# Altium PCB motordriver-v5.2 - panel.PcbDoc
Units mil, origin at the board's own origin, x right, y up, seen from the top; angles counter-clockwise.
Board outline 5010 x 6620 mil, 6 copper layers (Top Copper, GND Layer 1, Signal Layer 1, Signal Layer 2, PWR Layer 1, Bottom Copper), stack 58.2 mil thick; 32 components, 0 nets, 252 pads, 0 vias.
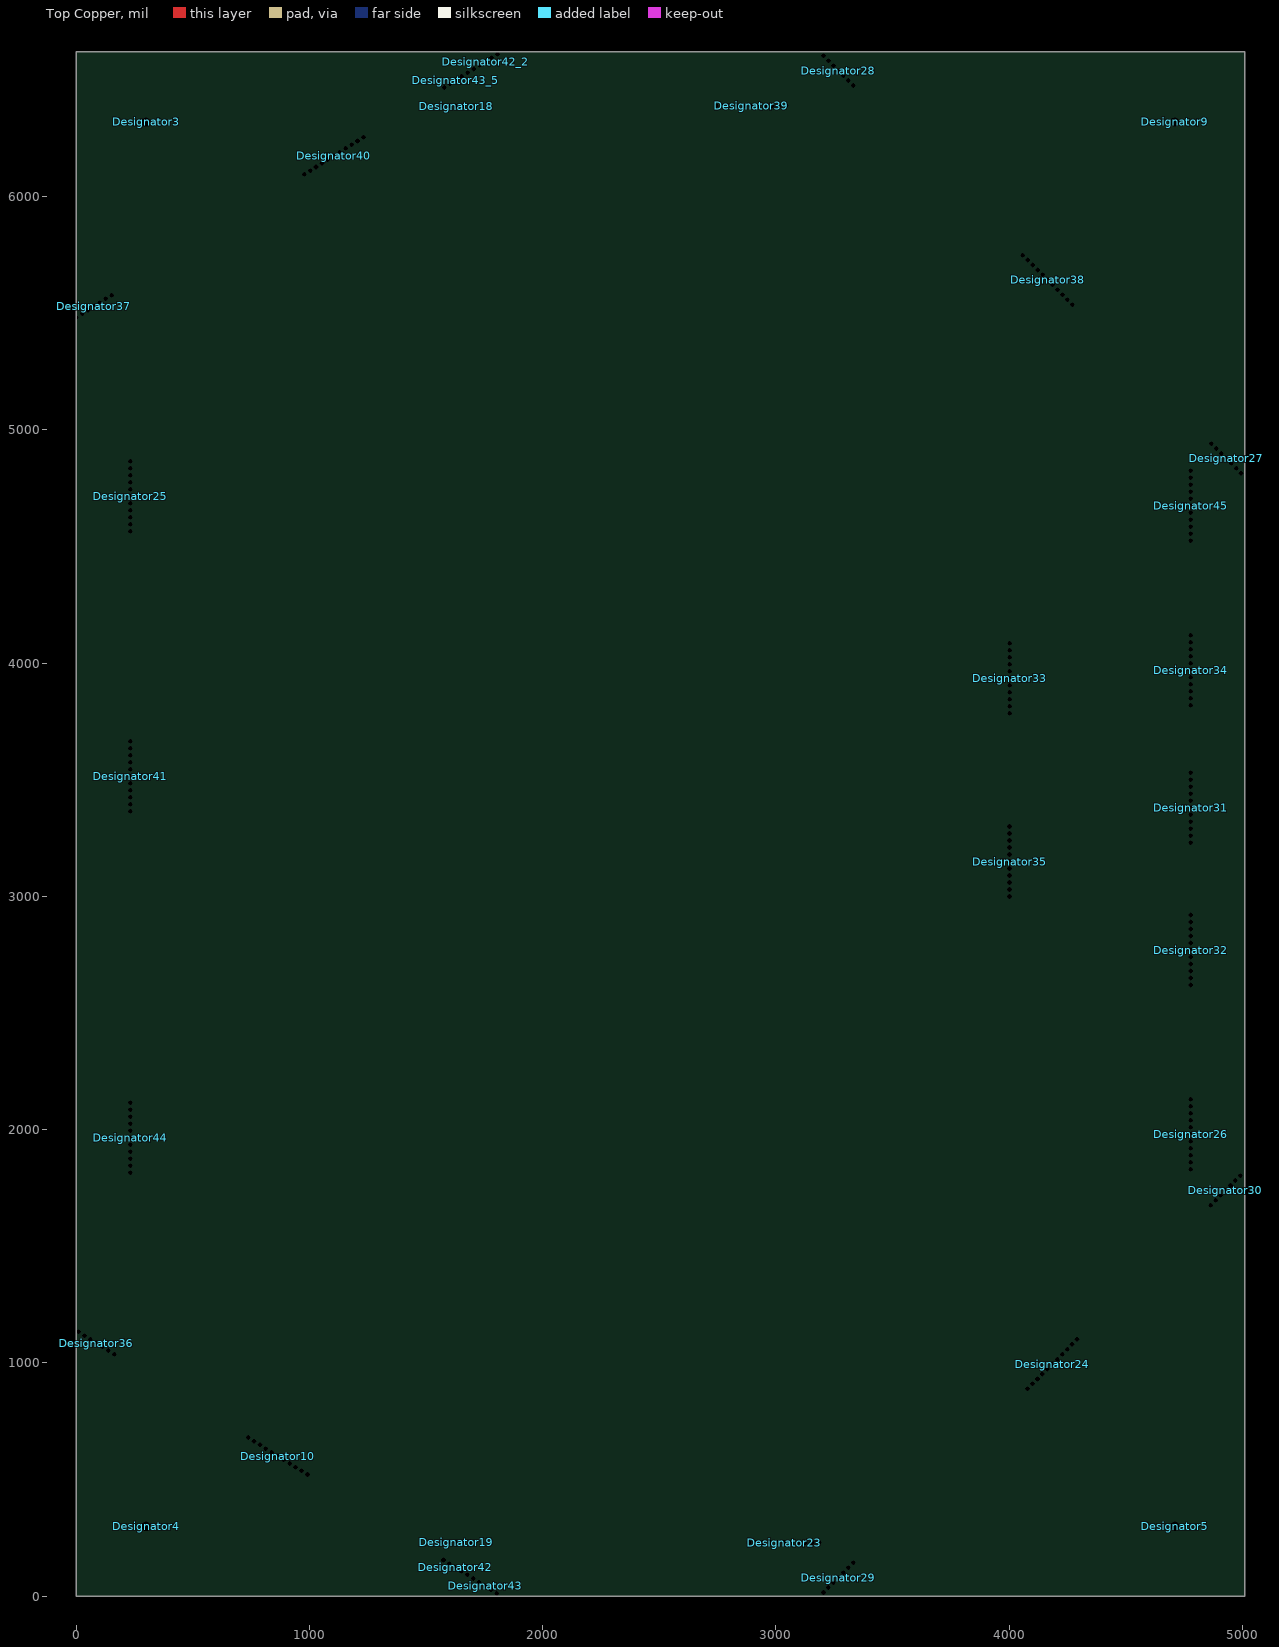
[diagram p0: Top Copper view]
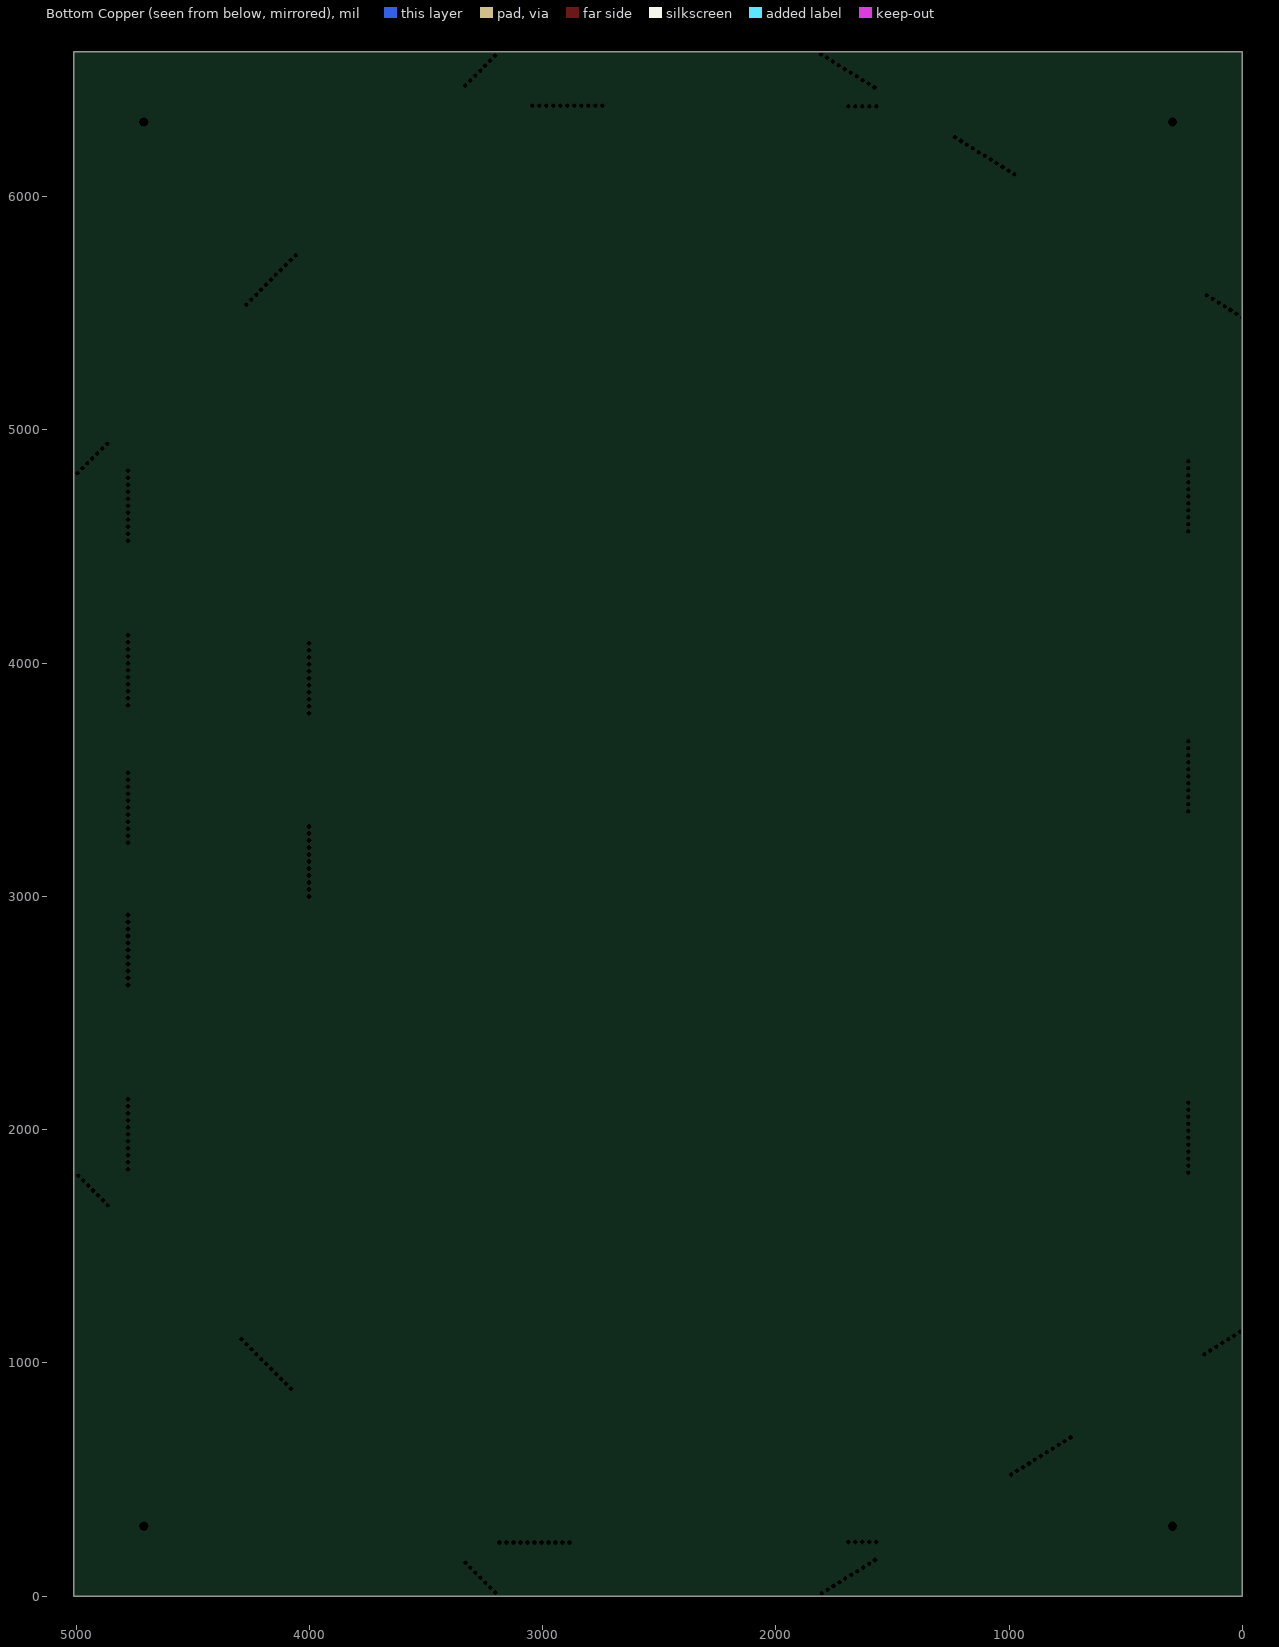
[diagram p1: Bottom Copper view, seen from below]

## Layer stack, top to bottom
Top Mask: solder mask 0.591, Solder Resist, Dk 3.8
Top Copper: signal copper 1.4
Dielectric 1: prepreg 4.05, 2116, Dk 4.2
Dielectric 2: prepreg 4.05, 2116, Dk 4.2
GND Layer 1: signal copper 1.4
Core 1: core 14, FR-4, Dk 4.2
Signal Layer 1: signal copper 1.4
Dielectric 3: prepreg 2.8, 2116, Dk 4.2
Dielectric 4: prepreg 2.8, 2116, Dk 4.2
Signal Layer 2: signal copper 1.4
Core 2: core 14, FR-4, Dk 4.2
PWR Layer 1: signal copper 1.4
Dielectric 5: prepreg 4.05, 2116, Dk 4.2
Dielectric 6: prepreg 4.05, 2116, Dk 4.2
Bottom Copper: signal copper 1.4
Bottom Mask: solder mask 0.591, Solder Resist, Dk 3.8

## Board outline
0,0 0,6620 5010,6620 5010,0

## Design rules (kind name [scope] priority, off if disabled: settings)
Clearance [All] p1: gap=10 ignorepadtopadclearanceinfootprint=FALSE except(0: Arc-Hole Track-Hole SMDPad-Hole THPad-Hole Via-Hole Fill-Hole Poly-Hole Region-Hole Text-Hole)
PolygonConnect [All] p1: connectstyle=Relief reliefconductorwidth=10 reliefentries=4 polygonreliefangle="90 Angle" airgapwidth=10
RoutingVias [All] p1: holewidth=28 width=50 viastyle="Through Hole" minholewidth=28 minwidth=50 maxholewidth=28 maxwidth=50
SolderMaskExpansion [All] p1: expansion=4 istentingtop=FALSE
Width [All] p1: maxlimit=10 minlimit=10 preferedwidth=10
30 further rules are at their usual default settings.

## Components (designator, comment, footprint, x,y, rotation, side; value= is the part's Value field where it differs from the comment)
Designator3 "Comment" Fiducial 300,6320 r0 top
Designator4 "Comment" Fiducial 300,300 r0 top
Designator5 "Comment" Fiducial 4710,300 r0 top
Designator9 "Comment" Fiducial 4710,6320 r0 top
Designator10 "Comment" "Mouse Bites"#1 851.31,579.7 r148 top
Designator18 "Comment" "Mouse Bites"#2 1630,6424 r0 top
Designator19 "Comment" "Mouse Bites"#2 1630,196 r180 top
Designator23 "Comment" "Mouse Bites"#1 3035,205 r180 top
Designator24 "Comment" "Mouse Bites"#1 4202.68,977.32 r225 top
Designator25 "Comment" "Mouse Bites"#1 207,4715 r90 top
Designator26 "Comment" "Mouse Bites"#1 4803,1980 r270 top
Designator27 "Comment" "Mouse Bites - 45 degrees" 4934.85,4924.24 r315 top
Designator28 "Comment" "Mouse Bites - 45 degrees" 3272.42,6586.67 r315 top
Designator29 "Comment" "Mouse Bites - 45 degrees" 3314.24,75.15 r225 top
Designator30 "Comment" "Mouse Bites - 45 degrees" 4974.24,1735.15 r225 top
Designator31 "Comment" "Mouse Bites"#1 4803,3380.6 r270 top
Designator32 "Comment" "Mouse Bites"#1 4803,2770 r270 top
Designator33 "Comment" "Mouse Bites"#1 4027.14,3935.27 r270 top
Designator34 "Comment" "Mouse Bites"#1 4803,3970 r270 top
Designator35 "Comment" "Mouse Bites"#1 4026.79,3149.28 r270 top
Designator36 "Comment" "Mouse Bites - 45 degrees" 93.21,1038.79 r148 top
Designator37 "Comment" "Mouse Bites - 45 degrees" 32.11,5544.3 r32 top
Designator38 "Comment" "Mouse Bites"#1 4182.68,5660.85 r315 top
Designator39 "Comment" "Mouse Bites"#1 2895,6415 r0 top
Designator40 "Comment" "Mouse Bites"#1 1091.75,6196.2 r32 top
Designator41 "Comment" "Mouse Bites"#1 207,3515 r90 top
Designator42 "Comment" "Mouse Bites"#2 1606.81,92.68 r148 top
Designator42_2 "Comment" "Mouse Bites"#3 1736.69,6609.44 r212 top
Designator43 "Comment" "Mouse Bites"#2 1734.01,13.19 r148 top
Designator43_5 "Comment" "Mouse Bites"#3 1609.48,6529.95 r212 top
Designator44 "Comment" "Mouse Bites"#1 207,1965 r90 top
Designator45 "Comment" "Mouse Bites"#1 4803,4675 r270 top

## Footprints (in the part's own frame and the unit in brackets; to place one, negate y for a bottom-side part, rotate by r counter-clockwise, add the part's x,y. Pads: shape width x height; smd on the part's side, far side on the other; paste and mask are expansions set on the pad)
Fiducial [mm] "1mm Fiducial for tack"
  round 0 hole 1 unplated mask+1: 1(0,0)
"Mouse Bites"#1 [mil] "Mouse Bites 100mil groove, 20mil holes, 30 mil separation"
  round 0 hole 20 unplated mask+0: 1(-150,-25) 2(-120,-25) 3(-90,-25) 4(-60,-25) 5(-30,-25) 6(0,-25) 7(30,-25) 8(60,-25) 9(90,-25) 10(120,-25) 11(150,-25)
"Mouse Bites"#2 [mil] "Mouse Bites 100mil groove, 20mil holes, 30 mil separation"
  round 0 hole 20 unplated mask+0: 1(-60,-36) 1(-30,-36) 1(0,-36) 1(30,-36) 1(60,-36)
"Mouse Bites"#3 [mil] "Mouse Bites 100mil groove, 20mil holes, 30 mil separation"
  round 0 hole 20 unplated mask+0: 1(-60,36) 1(-30,36) 1(0,36) 1(30,36) 1(60,36)
"Mouse Bites - 45 degrees" [mil] "Mouse Bites 100mil groove, 20mil holes, 30 mil separation"
  round 0 hole 20 unplated mask+0: 1(-60,-36) 1(-30,-36) 1(0,-36) 1(30,-36) 1(60,-36) 1(90,-36) 1(120,-36)

## Part data
Designator10 Designator23 Designator24 Designator25 Designator26 Designator31 Designator32 Designator33 Designator34 Designator35 Designator38 Designator39 Designator40 Designator41 Designator44 Designator45: library part "Mouse Bites"

## Nets (pads, with @x,y where several pads share a name; then routed paths per layer and width w, separated by ;. In a path a pad name is that pad's centre, name@x,y a point inside that pad or via, vN(x,y) a via of type N, cw(c..) or ccw(c..) an arc to the next point about the centre after c; other vN are vias at no path point)
pads on no net: Designator3.1 Designator4.1 Designator5.1 Designator9.1 Designator10.1 Designator10.2 Designator10.3 Designator10.4 Designator10.5 Designator10.6 Designator10.7 Designator10.8 Designator10.9 Designator10.10 Designator10.11 Designator18.1 Designator19.1 Designator23.1 Designator23.2 Designator23.3 Designator23.4 Designator23.5 Designator23.6 Designator23.7 Designator23.8 Designator23.9 Designator23.10 Designator23.11 Designator24.1 Designator24.2 Designator24.3 Designator24.4 Designator24.5 Designator24.6 Designator24.7 Designator24.8 Designator24.9 Designator24.10 Designator24.11 Designator25.1 Designator25.2 Designator25.3 Designator25.4 Designator25.5 Designator25.6 Designator25.7 Designator25.8 Designator25.9 Designator25.10 Designator25.11 Designator26.1 Designator26.2 Designator26.3 Designator26.4 Designator26.5 Designator26.6 Designator26.7 Designator26.8 Designator26.9 Designator26.10 Designator26.11 Designator27.1 Designator28.1 Designator29.1 Designator30.1 Designator31.1 Designator31.2 Designator31.3 Designator31.4 Designator31.5 Designator31.6 Designator31.7 Designator31.8 Designator31.9 Designator31.10 Designator31.11 Designator32.1 Designator32.2 Designator32.3 Designator32.4 Designator32.5 Designator32.6 Designator32.7 Designator32.8 Designator32.9 Designator32.10 Designator32.11 Designator33.1 Designator33.2 Designator33.3 Designator33.4 Designator33.5 Designator33.6 Designator33.7 Designator33.8 Designator33.9 Designator33.10 Designator33.11 Designator34.1 Designator34.2 Designator34.3 Designator34.4 Designator34.5 Designator34.6 Designator34.7 Designator34.8 Designator34.9 Designator34.10 Designator34.11 Designator35.1 Designator35.2 Designator35.3 Designator35.4 Designator35.5 Designator35.6 Designator35.7 Designator35.8 Designator35.9 Designator35.10 Designator35.11 Designator36.1 Designator37.1 Designator38.1 Designator38.2 Designator38.3 Designator38.4 Designator38.5 Designator38.6 Designator38.7 Designator38.8 Designator38.9 Designator38.10 Designator38.11 Designator39.1 Designator39.2 Designator39.3 Designator39.4 Designator39.5 Designator39.6 Designator39.7 Designator39.8 Designator39.9 Designator39.10 Designator39.11 Designator40.1 Designator40.2 Designator40.3 Designator40.4 Designator40.5 Designator40.6 Designator40.7 Designator40.8 Designator40.9 Designator40.10 Designator40.11 Designator41.1 Designator41.2 Designator41.3 Designator41.4 Designator41.5 Designator41.6 Designator41.7 Designator41.8 Designator41.9 Designator41.10 Designator41.11 Designator42.1 Designator42_2.1 Designator43.1 Designator43_5.1 Designator44.1 Designator44.2 Designator44.3 Designator44.4 Designator44.5 Designator44.6 Designator44.7 Designator44.8 Designator44.9 Designator44.10 Designator44.11 Designator45.1 Designator45.2 Designator45.3 Designator45.4 Designator45.5 Designator45.6 Designator45.7 Designator45.8 Designator45.9 Designator45.10 Designator45.11

## Silkscreen, mask and mechanical layers (free items; w line width, h text height)
Mechanical 1:
  the board outline again, w6
Route Tool Path:
  lines w90: 195,1767.14 195,1000.16 ; 195,2165 195.56,3316.26 ; 195,3715 195,4515 ; 195,4920 195,5621.57 ; 671.28,677.04 216.14,962.01 ; 919.81,6100.3 216.14,5659.72 ; 1012.23,463.57 1094.43,412.11 ; 1257.67,6311.7 1428.17,6418.45 ; 1520,195 1454.08,195 ; 1520,6426.73 1454.08,6426.73 ; 1740,195 1769.04,195 ; 1740,6426.73 1769.04,6426.73 ; 2696.54,6426.73 2160.42,6426.73 ; 2835,195 2160.42,195 ; 3095.84,6426.73 3291.01,6426.73 ; 3230,195 3291.01,195 ; 4037.15,3348.21 4037.32,3731.74 ; 4037.35,2945 4037.35,2332.24 4770.01,2332.24 ; 4037.35,4135 4037.35,4289.49 4770.01,4289.49 ; 4053.43,5808.43 3678.26,6183.59 ; 4067.55,827.45 3678.29,438.17 ; 4333.43,5528.43 4801.83,5060.03 ; 4350.04,1109.96 4801.8,1561.74 ; 4814.97,2967.68 4815,3180 ; 4815.01,1780 4815.01,1593.59 ; 4815.01,2175 4815.01,2287.24 ; 4815.01,2570 4815.01,2287.24 ; 4815,3580 4815,3770 ; 4815.01,4170 4815.01,4334.49 ; 4815.01,4475 4815.01,4334.49 ; 4815.01,4875 4815.01,5028.2 ; 195,1000.16 ccw(c240,1000.16) 216.12,962.02 216.14,962.01 ; 195,1000.16 ccw(c240,1000.16) 216.14,962.01 ; 195,5621.57 cw(c240,5621.57) 216.14,5659.72 ; 195,5621.57 cw(c240,5621.57) 216.12,5659.71 216.14,5659.72 ; 1094.43,412.11 ccw(c1118.33,450.24) 1094.45,412.1 ; 1094.45,412.1 1430.2,201.86 ; 1094.43,412.11 1094.45,412.09 ; 1430.2,201.86 ccw(c1454.08,240) 1454.08,195 ; 1430.2,201.86 ccw(c1454.08,240) 1454.08,195 ; 1454.08,6426.73 ccw(c1454.08,6381.73) 1430.2,6419.87 cw(c1454.08,6381.73) 1454.08,6426.73 ; 1769.04,195 ccw(c1769.04,240) 1813.3,231.88 ; 1769.04,195 ccw(c1769.04,240) 1813.3,231.88 ; 1769.04,6426.73 cw(c1769.04,6381.73) 1813.31,6389.82 ; 1769.04,6426.73 cw(c1769.04,6381.73) 1813.3,6389.87 1813.31,6389.82 ; 1813.3,231.88 1817.9,256.94 1825.04,277.92 1835.14,297.64 1848.03,315.68 1863.41,331.64 1880.96,345.21 1900.24,356.03 1920.97,363.96 1942.64,368.79 1964.71,370.43 1986.82,368.79 2008.47,363.96 2029.19,356.03 2048.51,345.2 2066.04,331.64 2081.43,315.68 2094.32,297.64 2104.42,277.92 2111.56,256.94 2116.16,231.88 ; 1813.31,6389.82 1817.9,6364.83 1825.04,6343.81 1835.14,6324.09 1848.03,6306.05 1863.41,6290.09 1880.96,6276.52 1900.24,6265.7 1920.97,6257.77 1942.64,6252.94 1964.71,6251.31 1986.82,6252.94 2008.47,6257.77 2029.19,6265.7 2048.51,6276.53 2066.04,6290.09 2081.41,6306.03 2094.28,6324.09 2104.42,6343.84 2111.55,6364.83 2116.16,6389.87 ; 2116.16,231.88 ccw(c2160.42,240) 2160.42,195 ; 2116.16,231.88 ccw(c2160.42,240) 2160.42,195 ; 2116.16,6389.87 cw(c2160.42,6381.73) 2160.42,6426.73 ; 2116.16,6389.87 cw(c2160.42,6381.73) 2160.42,6426.73 ; 3291.01,195 ccw(c3291.01,240) 3336.01,239.47 3336.01,239.5 ; 3291.01,195 ccw(c3291.01,240) 3336.01,239.5 ; 3291.01,6426.73 cw(c3291.01,6381.73) 3336.01,6382.26 ; 3291.01,6426.73 cw(c3291.01,6381.73) 3336.01,6382.23 ; 3336.01,239.5 3337.75,388.44 3338.9,398.67 3341.38,405.75 3345.35,412.08 3350.66,417.38 3356.99,421.36 3364.07,423.84 3374.04,424.96 3646.44,424.96 ; 3336.01,6382.26 3336.01,6382.23 ; 3336.01,6382.23 3337.75,6233.29 3338.9,6223.06 3341.38,6215.98 3345.35,6209.65 3350.66,6204.35 3356.99,6200.37 3364.07,6197.89 3374.04,6196.77 3646.44,6196.77 ; 3646.44,424.96 ccw(c3646.44,469.96) 3678.29,438.17 ; 3646.44,424.96 ccw(c3646.44,469.96) 3678.26,438.14 3678.29,438.17 ; 3646.44,6196.77 cw(c3646.44,6151.77) 3678.26,6183.59 ; 3646.44,6196.77 cw(c3646.44,6151.77) 3678.26,6183.59 ; 4770.01,2332.25 cw(c4770.01,2287.24) 4815.01,2287.24 ; 4770.01,2332.25 cw(c4770.01,2287.24) 4815.01,2287.24 ; 4770.01,4289.49 ccw(c4770.01,4334.49) 4815.01,4334.49 ; 4770.01,4289.49 ccw(c4770.01,4334.49) 4815.01,4334.49 ; 4801.8,1561.74 ccw(c4770.01,1593.59) 4815.01,1593.59 ; 4801.8,1561.74 4801.83,1561.77 ccw(c4770.01,1593.59) 4815.01,1593.59 ; 4801.83,5060.03 cw(c4770.01,5028.2) 4815.01,5028.2 ; 4801.83,5060.03 cw(c4770.01,5028.2) 4815.01,5028.2

## Panel: embedded boards
"motordriver-v5.2.PcbDoc" at 240,1000, 1 rows x 1 columns, spacing 6241.73 x 4631.01, rotation 0